# Altium PCB CE_BJTInfineonTSFP-4-1_v1.PcbDoc
Units mm, origin at the board's own origin, x right, y up, seen from the top; angles counter-clockwise.
Board outline 40.01 x 8 mm, 2 copper layers (Top Layer, Bottom Layer); 28 components, 11 nets, 63 pads, 4 vias.
Unrouted connection lines stored in the file: 5.
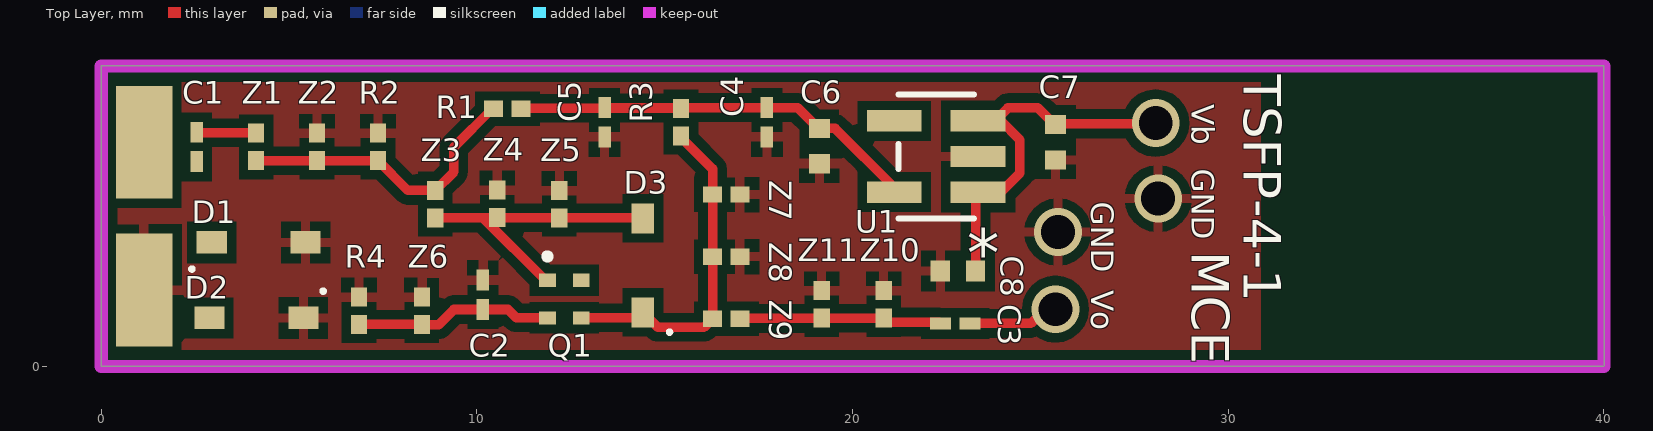
[diagram p0: Top Layer view]
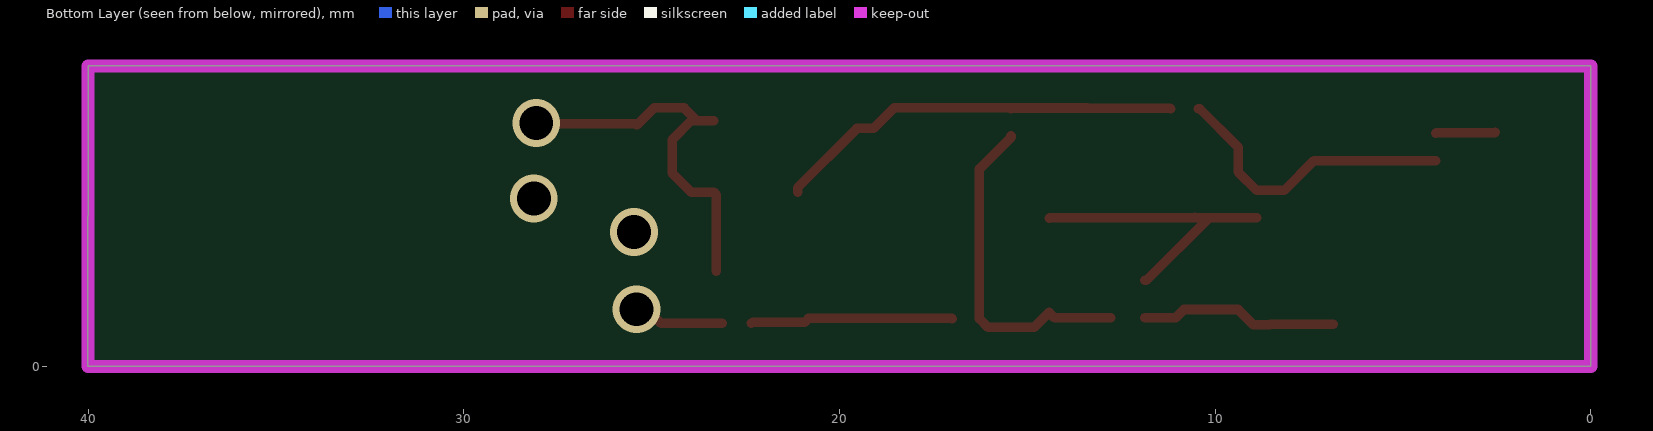
[diagram p1: Bottom Layer view, seen from below]

## Layer stack, top to bottom
Top Solder: solder mask 0.0102, Solder Resist, Dk 3.5
Top Layer: signal copper 0.0356
Dielectric 1: dielectric 0.32, FR-4, Dk 4.8
Bottom Layer: signal copper 0.0356
Bottom Solder: solder mask 0.0102, Solder Resist, Dk 3.5

## Board outline
0,0 40.005,0 40,8 0,8

## Design rules (kind name [scope] priority, off if disabled: settings)
Clearance [All] p1: gap=0.254 ignorepadtopadclearanceinfootprint=FALSE except(0: Arc-Hole Track-Hole SMDPad-Hole THPad-Hole Via-Hole Fill-Hole Poly-Hole Region-Hole Text-Hole)
PolygonConnect [All] p1: connectstyle=Relief reliefconductorwidth=0.254 reliefentries=4 polygonreliefangle="90 Angle" airgapwidth=0.254
RoomDefinition CE_BJTInfineonTSFP-4-1_v1 [InComponentClass('CE_BJTInfineonTSFP-4-1_v1')] p1: confinementstyle=ConfineIn formatcopy=TRUE lockcomponents=FALSE outline 0,8 40.005,8 40.005,0 0,0
RoutingVias [All] p1: holewidth=0.711 width=1.27 viastyle="Through Hole" minholewidth=0.711 minwidth=1.27 maxholewidth=0.711 maxwidth=1.27
SolderMaskExpansion [All] p1: expansion=0.102
Width [All] p1: maxlimit=0.254 minlimit=0.254 preferedwidth=0.254
30 further rules are at their usual default settings.

## Components (designator, comment, footprint, x,y, rotation, side; value= is the part's Value field where it differs from the comment)
C1 "Cin" C0201 2.54,5.841 r90 top value=Value
C2 "" C0201 10.16,1.905 r270 top value=Value
C3 "" C0201 22.733,1.142 r0 top value=Value
C4 "" CAP_CBR_0201 17.718,6.499 r90 top value=Value
C5 "" CAP_CBR_0201 13.4,6.499 r90 top value=Value
C6 "" YAG_CC0402 19.115,5.864 r90 top value=Value
C7 "" YAG_CC0402 25.4,5.968 r90 top value=Value
C8 "" YAG_CC0402 22.804,2.539 r0 top value=Value
D1 "" INF-SOD323_V 4.191,3.301 r90 top
D2 "" INF-SOD323_V 4.129,1.292 r270 top
D3 "" INF-SOD323_V 14.416,2.689 r180 top
Q1 "BFP720F" INF-TSFP-4-1_V 12.326,1.792 r0 top
R1 "" RES_RC0201_P6XP3 10.81,6.857 r0 top value=Value
R2 "" RES_RC0201_P6XP3 7.366,5.841 r270 top value=Value
R3 "" RES_RC0201_P6XP3 15.432,6.499 r90 top value=Value
R4 "" RES_RC0201_P6XP3 6.858,1.483 r270 top value=Value
U1 "" DBV5 22.225,5.587 r180 top value=Value
Z1 "" RES_RC0201_P6XP3 4.123,5.841 r270 top value=Value
Z2 "" RES_RC0201_P6XP3 5.744,5.841 r270 top value=Value
Z3 "" RES_RC0201_P6XP3 8.89,4.317 r270 top value=Value
Z4 "" RES_RC0201_P6XP3 10.541,4.332 r270 top value=Value
Z5 "" RES_RC0201_P6XP3 12.192,4.317 r270 top value=Value
Z6 "" RES_RC0201_P6XP3 8.534,1.483 r270 top value=Value
Z7 "" RES_RC0201_P6XP3 16.637,4.571 r180 top value=Value
Z8 "" RES_RC0201_P6XP3 16.637,2.92 r180 top value=Value
Z9 "" RES_RC0201_P6XP3 16.637,1.269 r0 top value=Value
Z10 "" RES_RC0201_P6XP3 20.828,1.65 r270 top value=Value
Z11 "" RES_RC0201_P6XP3 19.177,1.65 r270 top value=Value

## Footprints (in the part's own frame and the unit in brackets; to place one, negate y for a bottom-side part, rotate by r counter-clockwise, add the part's x,y. Pads: shape width x height; smd on the part's side, far side on the other; paste and mask are expansions set on the pad)
C0201 [mil]
  rect 21.78x13 smd paste+0 mask+0: 1(-15.39,0) 2(15.39,0)
  body extent 0,0 10,10, height 10
CAP_CBR_0201 [mil]
  rect 21.78x13 smd paste+0 mask+0: 1(-15.39,0) 2(15.39,0)
  body extent 0,0 10,10, height 10
DBV5 [mil]
  rect 57.56x22.36 smd paste+0 mask+0: 1(-44,37.4) 2(-44,0) 3(-44,-37.4) 4(44,-37.4) 5(44,37.4)
  silkscreen extent -40,-65 40,65, body extent 0,0 10,10, height 10
INF-SOD323_V [mm] "SOD, 2-Leads, Body 1.7x1.25 mm"
  rect 0.6x0.8 smd: 1(0,1.25) 2(0,-1.25)
  silkscreen extent -0.76,1.73 -0.66,1.83, body extent -0.63,-0.85 0.63,0.85, height 1.1
INF-TSFP-4-1_V [mm] "SOP-Flat, Body 0.8x1.4 mm, Pitch 1 mm"
  rect 0.45x0.35 smd: 1(-0.45,0.5) 2(-0.45,-0.5) 3(0.45,-0.5) 4(0.45,0.5)
  silkscreen extent -0.49,1.1 -0.41,1.17, body extent -0.4,-0.7 0.4,0.7, height 0.59
RES_RC0201_P6XP3 [mm]
  rect 0.503x0.43 smd paste+0 mask+0: 1(-0.366,0) 2(0.366,0)
  body extent 0,0 0.25,0.25, height 0.25
YAG_CC0402 [mil]
  rect 20x22 smd paste+0 mask+0: 1(-18.5,0) 2(18.5,0)
  body extent 0,0 10,10, height 10

## Part data
C1 C2 C3: library part C0201C270J3GACTU, "No Description Available", Built_By=EMA_UL_Team, Copyright="Copyright (C) 2018 Accelerated Designs. All rights reserved", Manufacturer_Part_Number=C0201C270J3GACTU, RefDes=RefDes, Type=DEV, Vendor=Kemet
C4 C5: library part CBR02C399C3GAC, "No Description Available", Built_By=EMA_UL_Team, Copyright="Copyright (C) 2018 Accelerated Designs. All rights reserved", Manufacturer_Part_Number=CBR02C399C3GAC, RefDes=RefDes, Type=DEV, Vendor=KEMET
C6 C7 C8: library part CC0402KRX7R9BB10, "No Description Available", Manufacturer_Part_Number=CC0402KRX7R9BB103, Built_By=EMA_UL_Team, Copyright="Copyright (C) 2018 Accelerated Designs. All rights reserved", RefDes=RefDes, Type=DEV, Vendor=Yageo
D1 D2 D3: library part BAT15-03W, "Single Silicon Schottky Diode, 110 mA IF Max, SOD32, Green", Manufacturer=Infineon, Supplier Part Number 1=N/A, ComponentLink1Description="Manufacturer URL", ComponentLink1URL=http://www.infineon.com/, ComponentLink2Description=Datasheet, ComponentLink2URL=http://www.infineon.com/dgdl/bat15series.pdf?folderId=db3a304314dca3890114ff6812070b44&fileId=db3a304314dca3890114ff6b74ca0b48&location=en.Products.RF.RF_Mixer___Detector_Schottky_Diodes.DATASHEET.bat15series.pdf, ComponentLink3Description="Package Specification", ComponentLink3URL=http://www.infineon.com/dgdl/SOD323-Package_Overview.pdf?folderId=db3a30431936bc4b011952aab84f3bbe&fileId=db3a30431936bc4b011952beed653be3, Configuration=Single, CT (typ)="0.26 pF", DatasheetVersion=Jun-2011, Green=yes, Group="RF Mixer", IF (max)="110 mA", Mounting Technology="Surface Mount", PackageDescription="2-Pin Small Outline Diode Package, 1.25 x 1.7 mm Body", PackageReference=SOD323, PartNumber=BAT15-03W, Supplier 1=Mouser, VF (typ)="0.23 V", VR (max)="4 V"
Q1: "SiGe:C Heterojunction Wideband RF Bipolar Transistor, 4 V VCEO, 20 mA IC, 26 dB Gmax, TSFP-4-1, Green", Manufacturer=Infineon, ComponentLink1Description="Manufacturer URL", ComponentLink1URL=http://www.infineon.com/, ComponentLink2Description=Datasheet, ComponentLink2URL=http://www.infineon.com/dgdl/bfp720f.pdf?folderId=db3a30431400ef68011425b291f205c5&fileId=db3a30431ddc9372011e2673bdbf4727&location=en.Products.RF.RF_Transistors_.Ultra_Low_Noise_SiGe_C_Transistors_for_use_up_to_12_GHz.DATASHEET.bfp720f.pdf, ComponentLink3Description="Package Specification", ComponentLink3URL=http://www.infineon.com/dgdl/TSFP-4-1%2C-2-Package_Overview.pdf?folderId=db3a30431936bc4b011953b7d203683d&fileId=db3a30431936bc4b011953c249663734, DatasheetVersion="Rev. 1.0", Gmax (typ)="26 dB", Green=yes, Group="Ultra low noise SiGe", Halogen-free=yes, IC (max)="20 mA", Mounting Technology="Surface Mount", NFmin (typ)="0.5 dB", PackageDescription="4-Pin Thin Small Flat Package, 0.8 x 1.4 mm Body, 0.5 mm Pitch", PackageReference=TSFP-4-1, PartNumber=BFP720F, Ptot (max)=80mW, VCEO (max)="4 V"
R1 R2 R3 R4 Z1 Z2 Z3 Z4 Z5 Z6 Z7 Z8 Z9 Z10 Z11: library part RC0201FR-0718KL, "No Description Available", Built_By=EMA_Anthony, Copyright="Copyright (C) 2018 Accelerated Designs. All rights reserved", Manufacturer_Part_Number=RC0201FR-0718KL, RefDes=RefDes, Type=DEV, Vendor=Yageo
U1: library part LP5907MFX-3.3/NO, "No Description Available", Manufacturer_Part_Number=LP5907MFX-3.3/NOPB, Built_By=EMA_UL_Team, Copyright="Copyright (C) 2018 Accelerated Designs. All rights reserved", RefDes=RefDes, Type=DEV, Vendor="Texas Instruments"

## Free pads (board coordinates)
  rect 1.5x3 smd: ""(1.143,2.031) ""(1.143,5.968)

## Via types
v1: diameter 1.27, hole 0.9, Top Layer to Bottom Layer, 4 vias

## Nets (pads, with @x,y where several pads share a name; then routed paths per layer and width w, separated by ;. In a path a pad name is that pad's centre, name@x,y a point inside that pad or via, vN(x,y) a via of type N, cw(c..) or ccw(c..) an arc to the next point about the centre after c; other vN are vias at no path point)
B: D3.2 Q1.1 Z3.2 Z4.2 Z5.2 | length 7.9
  Top Layer w0.254: Z3.2 10.166,3.951 ; Q1.1 11.826,2.292 10.166,3.951 ; D3.2 14.403,3.951 Z5.2 12.184,3.959 10.549,3.959 Z4.2 10.526,3.951 10.166,3.951
C: D3.1 Q1.3 R3.1 Z7.2 Z8.2 Z9.1 | length 9
  Top Layer w0.254: Q1.3 14.269,1.292 D3.1 14.817,1.038 16.04,1.038 Z9.1 Z8.2 Z7.2 16.271,5.257 15.432,6.096 R3.1
E: C2.2 Q1.2 R4.2 Z6.2 | length 2.5
  Top Layer w0.254: R4.2 Z6.2 Z6.2@8.546,1.105 ; 11.05,1.292 Q1.2
GND: C2.1 C4.1 C5.1 C6.1 C7.1 C8.1 D1.2 D2.1 pad.@1.143,2.031 R2.1 R4.1 U1.2 Z2.1 Z4.1 Z5.1 Z6.1 Z7.1 Z8.1 Z10.1 Z11.1
  other v1: 25.465,3.578 28.132,4.467
N1: C1.2 Z1.1 | length 1.6
  Top Layer w0.254: C1.2 2.553,6.219 4.11,6.219 Z1.1
N2: R1.1 R2.2 Z1.2 Z2.2 Z3.1 | length 7.9
  Top Layer w0.254: Z1.2 Z2.2 R2.2 8.158,4.683 Z3.1 9.386,5.179 9.386,5.835 10.408,6.857 R1.1
N3: C3.1 Z9.2 Z10.2 Z11.2 | length 5.4
  Top Layer w0.254: Z9.2 17.01,1.277 19.169,1.277 Z11.2 Z10.2 20.828,1.268 20.916,1.18 22.304,1.18 C3.1
Vbatt: C7.2 C8.2 U1.1 U1.3 | length 10.3
  Top Layer w0.254: C8.2 23.273,4.568 U1.1 23.946,4.637 24.455,5.145 24.455,6.029 23.946,6.537 U1.3@23.79,6.537 ; U1.3 U1.3@23.79,6.537 ; v1(28.067,6.476) 28.048,6.457 25.419,6.457 C7.2 25.375,6.438 24.933,6.88 24.132,6.88 U1.3@23.79,6.537
Vcc: C4.2 C5.2 C6.2 R1.2 R3.2 U1.5 | length 11
  Top Layer w0.254: R1.2 11.192,6.873 13.384,6.873 C5.2 13.412,6.877 15.419,6.877 R3.2 15.457,6.889 C4.2 18.533,6.889 19.089,6.333 C6.2 19.534,6.333 21.107,4.76 U1.5
Vin: C1.1 D1.1 D2.2 pad.@1.143,5.968
Vout: C3.2 | length 2.4
  Top Layer w0.254: C3.2 24.744,1.142 25.125,1.523 v1(25.4,1.523)
pads on no net: Q1.4 U1.4
copper on no net: | length 2.8
  Top Layer w0.254: 8.546,1.105 8.979,1.105 9.388,1.514 10.16,1.514 10.827,1.514 11.05,1.292

## Polygon pours and split planes (outlines as drawn)
GND on Top Layer "Top Layer-GND" (solid, pour order 4): 30.861,0 30.861,8.001 30.86,8 0,8 0,0

## Keep-outs
Keep-Out Layer:
  the board outline again, w0.35

## Silkscreen, mask and mechanical layers (free items; w line width, h text height)
Top Overlay:
  text "TSFP-4-1" at 30.418,7.769 h1 r270
  text "Vb" at 29.021,6.976 h0.6 r270
  text "GND" at 29.021,5.266 h0.6 r270
  text "GND" at 26.354,4.377 h0.6 r270
  text "MCE" at 29.021,3.07 h1 r270
  text "Vo" at 26.354,2.023 h0.6 r270

## Text inside footprints (layer, text, board x,y; h text height)
U1: Top Overlay "*" at 23.914,4.196 h1.27 r180; Mechanical 13 "*" at 23.165,5.161 h1.27 r180